# EAGLE board ProtoBoard (EAGLE 7.2.0)
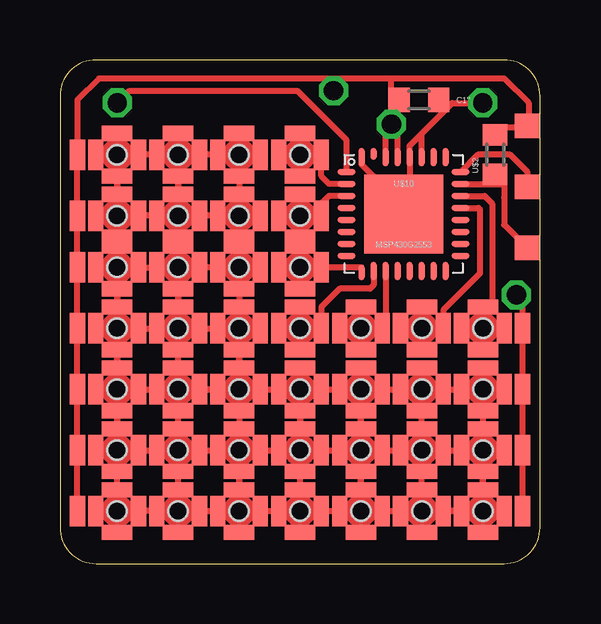
[diagram p0: board, top side]
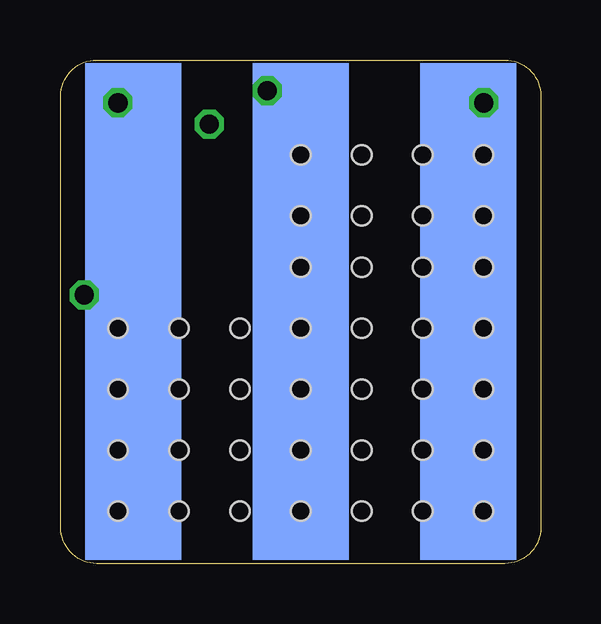
[diagram p1: board, bottom side, seen from below]

Size 20 x 21 mm. Coordinates in mm from the lower left corner, seen from the top.
Copper layers (1*16): Top 0.035mm / dielectric 1.5mm / Bottom 0.035mm
Design rules "Bilex DRU *": minimum track width 10mil, minimum drill 24mil, track to track 10mil, track to pad 10mil, pad to pad 10mil, via to via 10mil, smd to smd 10mil, copper to edge 1mil, drill to drill 8mil, minimum pad ring 10mil, minimum via ring 8mil, stop-mask expansion 4mil, vias tented up to drill 0mil, thermal gap 10mil

## Footprints (pad centres in the part's own frame; a part is rotated, then mirrored left to right if it is on the bottom)
PROTPAD = smd 1.27 x 0.635: P$1 0,0.889; P$4 0,-0.889 | smd 0.635 x 1.27: P$2 -0.889,0; P$3 0.889,0 | hole 0.8: 0,0
603 = smd 0.889 x 1.016: 1 -0.826,0; 2 0.826,0
CARRIER_SMD2_WIDE_3POL = smd 4 x 20.7 bottom: GND -6.985,3.493; RX/TX 6.985,3.493; VCC 0,3.493 | smd 1.016 x 1.016: RST -9.461,0.826; TST -9.461,-1.714; VCC'' -9.461,-4.255
PROTOPADSINGLE = smd 0.635 x 1.27: P$3 0,0
QFN32 = smd 0.762 x 0.254: 1 -2.375,1.75; 2 -2.375,1.25; 3 -2.375,0.75; 4 -2.375,0.25; 5 -2.375,-0.25; 6 -2.375,-0.75; 7 -2.375,-1.25; 8 -2.375,-1.75; 17 2.375,-1.75; 18 2.375,-1.25; 19 2.375,-0.75; 20 2.375,-0.25; 21 2.375,0.25; 22 2.375,0.75; 23 2.375,1.25; 24 2.375,1.75 | smd 0.254 x 0.635: 9 -1.75,-2.438 | smd 0.254 x 0.762: 10 -1.25,-2.375; 11 -0.75,-2.375; 12 -0.25,-2.375; 13 0.25,-2.375; 14 0.75,-2.375; 15 1.25,-2.375; 16 1.75,-2.375; 25 1.75,2.375; 26 1.25,2.375; 27 0.75,2.375; 28 0.25,2.375; 29 -0.25,2.375; 30 -0.75,2.375; 32 -1.75,2.375 | smd 0.254 x 0.508: 31 -1.25,2.5 | smd 3.302 x 3.302: TP 0,0

## Placement (x,y rotation side)
A1  PAD  [PROTPAD]  2.38,2.19 0 top
A2  PAD  [PROTPAD]  4.92,2.19 0 top
A3  PAD  [PROTPAD]  7.46,2.19 0 top
A4  PAD  [PROTPAD]  10,2.19 0 top
A5  PAD  [PROTPAD]  12.54,2.19 0 top
A6  PAD  [PROTPAD]  15.08,2.19 0 top
A7  PAD  [PROTPAD]  17.62,2.19 0 top
B1  PAD  [PROTPAD]  2.38,4.73 0 top
B2  PAD  [PROTPAD]  4.92,4.73 0 top
B3  PAD  [PROTPAD]  7.46,4.73 0 top
B4  PAD  [PROTPAD]  10,4.73 0 top
B5  PAD  [PROTPAD]  12.54,4.73 0 top
B6  PAD  [PROTPAD]  15.08,4.73 0 top
B7  PAD  [PROTPAD]  17.62,4.73 0 top
C1  PAD  [PROTPAD]  2.38,7.27 0 top
C1''  100n  [603]  14.95,19.33 0 top
C2  PAD  [PROTPAD]  4.92,7.27 0 top
C3  PAD  [PROTPAD]  7.46,7.27 0 top
C4  PAD  [PROTPAD]  10,7.27 0 top
C5  PAD  [PROTPAD]  12.54,7.27 0 top
C6  PAD  [PROTPAD]  15.08,7.27 0 top
C7  PAD  [PROTPAD]  17.62,7.27 0 top
D1  PAD  [PROTPAD]  2.38,9.81 0 top
D2  PAD  [PROTPAD]  4.92,9.81 0 top
D3  PAD  [PROTPAD]  7.46,9.81 0 top
D4  PAD  [PROTPAD]  10,17.05 0 top
D5  PAD  [PROTPAD]  10,14.51 0 top
D6  PAD  [PROTPAD]  10,12.35 0 top
D7  PAD  [PROTPAD]  10,9.81 0 top
E1  PAD  [PROTPAD]  2.38,12.35 0 top
E2  PAD  [PROTPAD]  4.92,12.35 0 top
E3  PAD  [PROTPAD]  7.46,12.35 0 top
E4  PAD  [PROTPAD]  15.08,9.81 0 top
E5  PAD  [PROTPAD]  17.62,9.81 0 top
E6  PAD  [PROTPAD]  12.54,9.81 0 top
E8  PAD  [PROTPAD]  7.46,14.51 0 top
E9  PAD  [PROTPAD]  2.38,14.51 0 top
E10  PAD  [PROTPAD]  4.92,14.51 0 top
E11  PAD  [PROTPAD]  7.46,17.05 0 top
E12  PAD  [PROTPAD]  2.38,17.05 0 top
E13  PAD  [PROTPAD]  4.92,17.05 0 top
U$1  CARRIER_SMD2SMD2_3POL_W  [CARRIER_SMD2_WIDE_3POL]  10,14 180 top
U$2  10k  [603]  18.13,17.05 90 top
U$3  PINHDPROTOSINGLE  [PROTOPADSINGLE]  0.73,2.19 0 top
U$4  PINHDPROTOSINGLE  [PROTOPADSINGLE]  0.73,4.73 0 top
U$5  PINHDPROTOSINGLE  [PROTOPADSINGLE]  0.73,7.27 0 top
U$6  PINHDPROTOSINGLE  [PROTOPADSINGLE]  0.73,9.81 0 top
U$7  PINHDPROTOSINGLE  [PROTOPADSINGLE]  0.73,12.35 0 top
U$8  PINHDPROTOSINGLE  [PROTOPADSINGLE]  19.27,2.19 0 top
U$9  PINHDPROTOSINGLE  [PROTOPADSINGLE]  19.27,4.73 0 top
U$10  MSP430G2553  [QFN32]  14.32,14.58 0 top
U$11  PINHDPROTOSINGLE  [PROTOPADSINGLE]  19.27,7.27 0 top
U$12  PINHDPROTOSINGLE  [PROTOPADSINGLE]  19.27,9.81 0 top
U$14  PINHDPROTOSINGLE  [PROTOPADSINGLE]  0.73,14.51 0 top
U$15  PINHDPROTOSINGLE  [PROTOPADSINGLE]  0.73,17.05 0 top

## Library data of the parts
A1-A7 B1-B7 C1 C1'' C2-C7 D1-D7 E1-E6 E8-E13 U$1-U$12 U$14 U$15 = thar

## Nets
GND: C1''.2 U$1.GND U$8.P$3 U$9.P$3 U$10.27 U$10.28 U$10.32 U$10.TP U$11.P$3 U$12.P$3
N$2: A1.P$1 A1.P$2 A1.P$3 A1.P$4 A2.P$1 A2.P$2 A2.P$3 A2.P$4 A3.P$1 A3.P$2 A3.P$3 A3.P$4 A4.P$1 A4.P$2 A4.P$3 A4.P$4 A5.P$1 A5.P$2 A5.P$3 A5.P$4 A6.P$1 A6.P$2 A6.P$3 A6.P$4 A7.P$1 A7.P$2 A7.P$3 A7.P$4 B1.P$1 B1.P$2 B1.P$3 B1.P$4 B2.P$1 B2.P$2 B2.P$3 B2.P$4 B3.P$1 B3.P$2 B3.P$3 B3.P$4 B4.P$1 B4.P$2 B4.P$3 B4.P$4 B5.P$1 B5.P$2 B5.P$3 B5.P$4 B6.P$1 B6.P$2 B6.P$3 B6.P$4 B7.P$1 B7.P$2 B7.P$3 B7.P$4 C1.P$1 C1.P$2 C1.P$3 C1.P$4 C2.P$1 C2.P$2 C2.P$3 C2.P$4 C3.P$1 C3.P$2 C3.P$3 C3.P$4 C4.P$1 C4.P$2 C4.P$3 C4.P$4 C5.P$1 C5.P$2 C5.P$3 C5.P$4 C6.P$1 C6.P$2 C6.P$3 C6.P$4 C7.P$1 C7.P$2 C7.P$3 C7.P$4 D1.P$1 D1.P$2 D1.P$3 D1.P$4 D2.P$1 D2.P$2 D2.P$3 D2.P$4 D3.P$1 D3.P$2 D3.P$3 D3.P$4 E1.P$1 E1.P$2 E1.P$3 E1.P$4 E2.P$1 E2.P$2 E2.P$3 E2.P$4 E3.P$1 E3.P$2 E3.P$3 E3.P$4 E8.P$1 E8.P$2 E8.P$3 E8.P$4 E9.P$1 E9.P$2 E9.P$3 E9.P$4 E10.P$1 E10.P$2 E10.P$3 E10.P$4 E11.P$1 E11.P$2 E11.P$3 E11.P$4 E12.P$1 E12.P$2 E12.P$3 E12.P$4 E13.P$1 E13.P$2 E13.P$3 E13.P$4
N$3: U$1.TST U$10.24
N$4: U$1.RST U$2.1 U$10.23
N$5: D4.P$1 D4.P$2 D4.P$3 D4.P$4 U$10.2
N$6: D5.P$1 D5.P$2 D5.P$3 D5.P$4 U$10.3
N$7: E5.P$1 E5.P$2 E5.P$3 E5.P$4 U$10.22
N$11: E4.P$1 E4.P$2 E4.P$3 E4.P$4 U$10.21
N$12: U$1.RX/TX U$10.1
N$13: D6.P$1 D6.P$2 D6.P$3 D6.P$4 U$10.9
N$14: D7.P$1 D7.P$2 D7.P$3 D7.P$4 U$10.10
N$16: E6.P$1 E6.P$2 E6.P$3 E6.P$4 U$10.11
VCC: C1''.1 U$1.VCC U$1.VCC'' U$2.2 U$3.P$3 U$4.P$3 U$5.P$3 U$6.P$3 U$7.P$3 U$10.29 U$10.30 U$14.P$3 U$15.P$3

## Tracks (layer width: path | path; a pad name or v marks a point on that pad's centre or on a via)
GND  (via drill 0.8)
  Top 0.254: 14.57,15.53 U$10.28 14.57,17.43 15.07,17.93 | 14.57,15.53 14.19,15.61 14.08,15.54 14.26,15.5 U$10.TP 13.3,15.39 13.18,15.59 13.56,14.38 | 14.57,15.53 13.55,15.65 12.57,16.64 U$10.32 | 15.07,17.93 16.1,18.95 | 16.1,18.95 16.35,19.21 v17.62,19.21 | U$10.27 15.07,17.93 | C1''.2 15.78,19.27 16.1,18.95 | U$8.P$3 U$9.P$3 U$11.P$3 U$12.P$3 19.27,10.95 v19.02,11.21
  Bottom 0.254: 17.56,18.64 v17.62,19.21 16.98,18.57 U$1.GND 17.94,10.89 18.38,11.21 v19.02,11.21
N$2
  Top 0.254: A2.P$2 A1.P$3 2.38,2.19 | A7.P$2 A6.P$3 | A7.P$1 B7.P$4 | A6.P$1 B6.P$4 | 12.41,3.84 B5.P$4 A5.P$1 | A4.P$1 B4.P$4 | A3.P$1 B3.P$4 | A2.P$1 B2.P$4 | A1.P$1 B1.P$4 2.38,4.73 | B1.P$3 B2.P$2 | B2.P$3 B3.P$2 | B3.P$3 B4.P$2 | B4.P$3 B5.P$2 | B5.P$3 B6.P$2 | B6.P$3 B7.P$2 | C7.P$4 B7.P$1 | B5.P$1 C5.P$4 | C5.P$3 C6.P$2 | C4.P$3 C5.P$2 | C4.P$4 B4.P$1 | C3.P$2 C2.P$3 | C3.P$1 D3.P$4 | E9.P$3 E10.P$2 4.92,14.51 | E10.P$1 E13.P$4 | E13.P$2 E12.P$3 | E12.P$4 E9.P$1 | E1.P$3 E2.P$2 | E2.P$4 D2.P$1 | E1.P$4 D1.P$1 | D1.P$4 C1.P$1 | B1.P$1 C1.P$4 2.38,7.27 | B2.P$1 C2.P$4 | E1.P$2 E2.P$2 | 17.62,7.27 B7.P$1 | 17.62,4.73 A7.P$1 | 17.62,2.19 A7.P$4 | A1.P$4 2.38,2.19 | 2.38,2.19 A1.P$2 | 15.08,2.19 A7.P$2 | A7.P$3 17.62,2.19 | 2.38,4.73 B1.P$2 | B1.P$3 B3.P$2 | 7.46,4.73 B4.P$2 | B4.P$3 B6.P$2 | B6.P$2 B7.P$2 | 17.62,4.73 B7.P$3 | 17.62,4.73 B7.P$2 | 2.38,7.27 C1.P$2 | C4.P$3 C6.P$2 | 15.08,7.27 C6.P$3 C7.P$2 17.62,7.27 | D1.P$4 2.38,9.81 | 2.38,9.81 D1.P$2 D1.P$3 | 2.38,9.81 D1.P$3 | D1.P$3 D2.P$2 D2.P$3 D3.P$2 7.46,9.81 | 2.38,2.19 D1.P$4 | D1.P$1 E1.P$1 E9.P$4 2.38,14.51 | E13.P$2 E13.P$3 E11.P$2 E11.P$3 | E13.P$1 E10.P$1 | 7.46,9.81 C3.P$1 | 7.46,4.73 A3.P$1 | 7.46,2.19 A3.P$4 | A2.P$4 4.92,2.19 | A2.P$1 C2.P$4 | 4.92,7.27 C2.P$1 D2.P$4 D2.P$1 | D2.P$1 4.92,12.35 | 2.38,14.51 E12.P$4 | 2.38,17.05 E12.P$1 | 4.92,14.51 E10.P$3 E8.P$2 E8.P$3 | A4.P$4 10,2.19 | A4.P$1 C4.P$4 | C5.P$1 B5.P$1 | 12.54,2.19 A5.P$4 | A6.P$4 15.08,2.19 | A6.P$1 B6.P$1 C6.P$4 15.08,7.27 | 17.62,2.19 A7.P$2 | 17.62,2.19 A7.P$1 | B7.P$1 17.62,4.73 | 17.62,7.27 18.26,7.27 18.38,7.4 C7.P$3 | 17.62,7.27 C7.P$1 | 4.16,2.06 A2.P$2 | A2.P$2 4.92,2.19 | A2.P$1 4.92,2.19 | 4.92,2.19 A2.P$3 A3.P$2 7.46,2.19 | 7.46,2.19 A3.P$3 A4.P$2 10,2.19 | A3.P$1 7.46,2.19 | A4.P$1 10,2.19
  Top 0.254: 10,2.19 A4.P$3 A5.P$2 12.54,2.19 | A5.P$1 12.54,2.19 | 12.54,2.19 A5.P$3 A6.P$2 15.08,2.19 | A6.P$1 15.08,2.19 | 15.08,7.27 C6.P$2 | 2.38,7.27 C1.P$3 C2.P$2 4.92,7.27 | C3.P$1 C3.P$4 B3.P$1 7.46,4.73 | C2.P$3 C3.P$3 C4.P$2 10,7.27 | D1.P$1 D1.P$4 | D3.P$3 7.46,9.81 | 7.46,9.81 D3.P$1 E3.P$4 E3.P$1 E8.P$4 E8.P$1 E11.P$4 E11.P$1 | C4.P$1 10,7.27 | 10,7.27 C4.P$3 | 10,7.27 C4.P$4 | B4.P$2 B4.P$3 | 7.46,4.73 B3.P$2 | C2.P$3 4.92,7.27 | 4.92,7.27 C2.P$4 | B1.P$3 2.38,4.73 | B5.P$1 A5.P$1 | E13.P$2 2.38,17.05 | 2.38,17.05 E12.P$4 | E10.P$1 4.92,14.51 | 4.92,14.51 E10.P$4 E2.P$1 4.92,12.35 | 4.92,12.35 E2.P$2 | E12.P$2 2.38,17.05 | E9.P$2 2.38,14.51 | 4.92,12.35 E2.P$3 E3.P$2 E3.P$3 | C6.P$1 15.08,7.27 | 2.38,14.51 2.89,14.51
N$3
  Top 0.254: U$1.TST 19.46,16.35 18.76,17.05 17.41,17.05 U$10.24
N$4
  Top 0.254: 19.53,13.49 U$1.RST 18.51,14.13 18.51,15.27 18.51,15.83 | 17.94,16.29 U$2.1 | 17.76,15.95 U$2.1 | U$2.1 18.19,16.16 18.51,16.16 18.51,15.83 | U$10.23 18.51,15.83
N$5
  Top 0.254: 10,17.05 D4.P$4 | D4.P$2 10,17.05 | 10,17.05 D4.P$3 | 10.89,16.59 D4.P$3 | D4.P$1 10,17.05 | U$10.2 11.22,15.83 10.89,16.16 D4.P$3
N$6
  Top 0.254: D5.P$1 10,14.51 | 10,14.51 D5.P$4 | 10,14.51 D5.P$3 10.89,15.02 11.2,15.33 U$10.3 | D5.P$2 10,14.51
N$7
  Top 0.254: 17.62,9.81 E5.P$1 18,10.7 18,15.02 17.69,15.33 U$10.22 | 17.62,9.81 E5.P$4 | E5.P$2 17.62,9.81 | E5.P$3 17.62,9.81
N$11
  Top 0.254: E4.P$1 15.08,9.81 | 15.08,9.81 E4.P$4 | 15.08,9.81 E4.P$3 15.97,10.57 17.49,12.1 17.49,14.76 17.43,14.83 U$10.21 | E4.P$2 15.08,9.81
N$12  (via drill 0.8)
  Top 0.254: U$10.1 11.94,17.65 9.88,19.71 2.89,19.71 2.51,19.34 v2.38,19.21
  Bottom 0.254: v2.38,19.21 2.89,11.02 U$1.RX/TX
N$13
  Top 0.254: D6.P$1 10,12.35 | 10,12.35 D6.P$4 | 10,12.35 D6.P$2 | 10,12.35 D6.P$3 12.57,12.35 U$10.9
N$14
  Top 0.254: 10,9.81 D7.P$4 | D7.P$2 10,9.81 | 10,9.81 D7.P$3 | 11.02,9.94 D7.P$3 | D7.P$1 10,9.81 | U$10.10 13.07,11.61 12.92,11.46 11.65,11.46 10.89,10.7 D7.P$3
N$16
  Top 0.254: 12.54,9.81 E6.P$3 13.57,9.95 U$10.11 | E6.P$1 12.54,9.81 | 12.54,9.81 E6.P$4 | E6.P$2 12.54,9.81
VCC  (via drill 0.8)
  Top 0.254: 13.81,20.23 18.51,20.23 19.52,19.21 19.52,18.26 U$1.VCC'' | 13.81,20.23 | 13.81,20.23 13.3,20.23 | 13.3,20.23 11.41,20.23 v11.4,19.71 11.4,20.22 1.62,20.22 0.73,19.33 U$15.P$3 U$14.P$3 U$7.P$3 U$6.P$3 U$5.P$3 U$4.P$3 U$3.P$3 | U$1.VCC'' 19.72,18.26 19.78,18.32 | U$2.2 18.13,17.94 18.26,18.19 19.33,18.19 U$1.VCC'' | 13.3,20.23 13.69,20.22 13.81,20.23 | U$10.30 13.57,18.08 v13.81,18.32 | U$10.29 14.07,18.06 v13.81,18.32 | v13.81,18.32 13.81,19.33 | 13.81,19.33 13.81,20.23 | C1''.1 13.81,19.33
  Bottom 0.254: U$1.VCC 10,18.32 v11.4,19.71